# EAGLE board BUB_II.v1.2 (EAGLE 5.11)
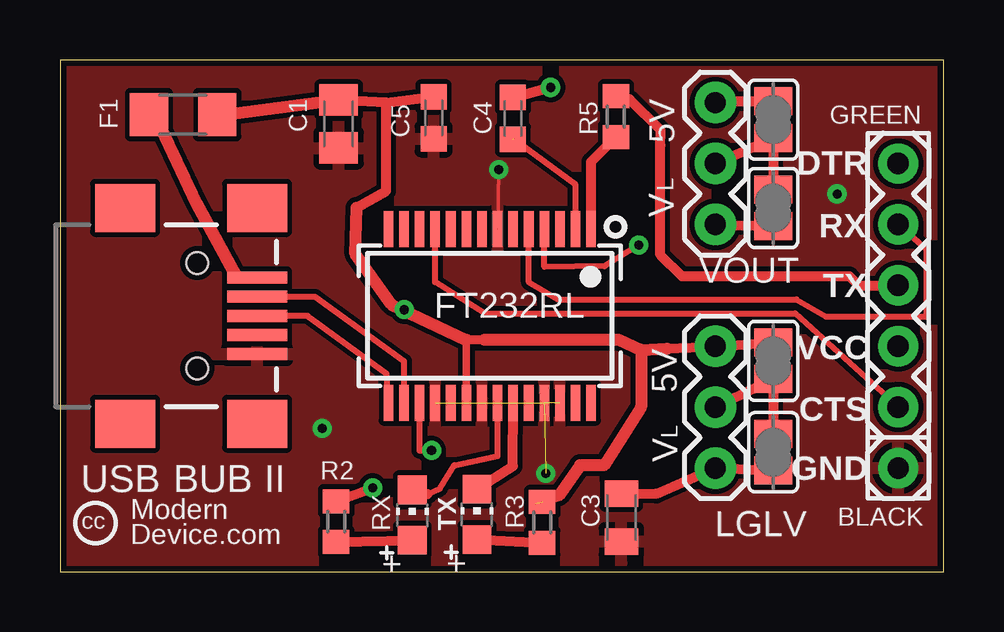
[diagram p0: board, top side]
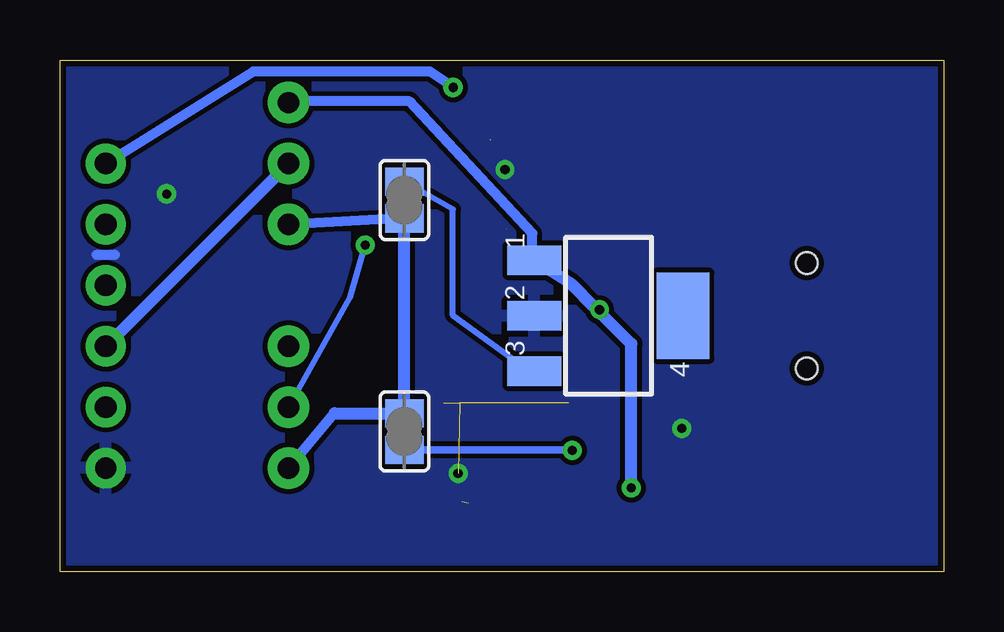
[diagram p1: board, bottom side, seen from below]

Size 36.83 x 21.34 mm. Coordinates in mm from the lower left corner, seen from the top.
Outline: 0,0 36.83,0 36.83,21.34 0,21.34 0,0
Copper layers (1*16): Top 0.035mm / dielectric 1.5mm / Bottom 0.035mm
Design rules "default *": minimum track width 10mil, minimum drill 15mil, track to track 8mil, track to pad 8mil, pad to pad 8mil, via to via 8mil, smd to smd 8mil, copper to edge 10mil, drill to drill 8mil, minimum pad ring 10mil, minimum via ring 8mil, stop-mask expansion 4mil, vias tented up to drill 25mil, thermal gap 10mil
Net classes: 0 default: width 0.254 mm, clearance 0.203 mm; 1 power: width 0.508 mm, clearance 0.203 mm to class 0, clearance 0.203 mm
tRestrict: area 20.4,6.5 to 20.6,7.6; area 19.8,6.7 to 20,7.4; area 21,6.6 to 21.1,7.5

## Footprints (pad centres in the part's own frame; a part is rotated, then mirrored left to right if it is on the bottom)
SJ = smd 1.168 x 1.6: 1 -0.762,0; 2 0.762,0
C0805K = smd 1.3 x 1.6: 1 -1,0; 2 1,0
C0805K' = smd 1.1 x 1.4: 1 -1,0; 2 1,0
C0603K = smd 1.05 x 1.08: 1 -0.875,0; 2 0.875,0
USB-MINIB = smd 2.5 x 0.5: D+ 2.5,0; D- 2.5,0.8; GND 2.5,-1.6; ID 2.5,-0.8; VBUS 2.5,1.6 | smd 2.5 x 2: MTN1 -3,4.5; MTN2 2.5,4.5; MTN3 -3,-4.5; MTN4 2.5,-4.5 | hole 0.9: 0,2.2; 0,-2.2
R1206 = smd 1.6 x 1.803: 1 -1.422,0; 2 1.422,0
SSOP28 = smd 0.4 x 1.5: 1 -4.225,-3.625; 2 -3.575,-3.625; 3 -2.925,-3.625; 4 -2.275,-3.625; 5 -1.625,-3.625; 6 -0.975,-3.625; 7 -0.325,-3.625; 8 0.325,-3.625; 9 0.975,-3.625; 10 1.625,-3.625; 11 2.275,-3.625; 12 2.925,-3.625; 13 3.575,-3.625; 14 4.225,-3.625; 15 4.225,3.625; 16 3.575,3.625; 17 2.925,3.625; 18 2.275,3.625; 19 1.625,3.625; 20 0.975,3.625; 21 0.325,3.625; 22 -0.325,3.625; 23 -0.975,3.625; 24 -1.625,3.625; 25 -2.275,3.625; 26 -2.925,3.625; 27 -3.575,3.625; 28 -4.225,3.625
1X06 = drill 0.889 pad 1.676 round: 1 0,0 | drill 0.9 pad 1.676 round: 2 2.54,0; 3 5.08,0; 4 7.62,0; 5 10.16,0; 6 12.7,0
1X03 = drill 0.889 pad 1.727 round: 1 0,0; 2 2.54,0; 3 5.08,0
R0603 = smd 1 x 1.1: 1 -0.85,0; 2 0.85,0
CHIP-LED0805 = smd 1.2 x 1.2: A 0,-1.05; C 0,1.05
SOT223 = smd 1.219 x 2.235: 1 -2.311,-3.099; 2 0,-3.099; 3 2.311,-3.099 | smd 3.6 x 2.2: 4 0,3.099

## Placement (x,y rotation side)
3V3_OUT  [SJ]  22.48,5.84 270 bottom
C1  10uF  [C0805K]  11.61,18.67 270 top
C3  1uF  [C0805K']  23.39,2.26 270 top
C4  0.1uF  [C0603K]  18.87,18.9 270 top
C5  0.1uF  [C0603K]  15.57,18.92 270 top
CN1  MINIB  [USB-MINIB]  5.71,10.67 0 top
F1  Bourns MF-PSMF035X-2  [R1206]  5.13,19.05 0 top
FT232RL  FT232RL  [SSOP28]  17.91,10.67 180 top
FTDI  [1X06]  34.92,4.32 90 top
LGLV  [1X03]  27.3,4.32 90 top
R2  1K  [R0603]  11.51,2.08 270 top
R3  1K  [R0603]  20.09,2.06 270 top
R5  10k  [R0603]  23.16,18.97 270 top
RX  Green  [CHIP-LED0805]  14.68,2.36 0 top
SJ1  [SJ]  29.72,18.85 270 top
SJ2  [SJ]  29.72,8.79 270 top
SJ4  [SJ]  29.72,15.16 270 top
SJ5  [SJ]  29.72,4.98 270 top
TX  Red  [CHIP-LED0805]  17.37,2.39 0 top
VOUT  [1X03]  27.3,14.48 90 top
VR  MCP1703DB  [SOT223]  13.97,10.67 270 bottom
VR_OUT  [SJ]  22.48,15.49 270 bottom

## Library data of the parts
3V3_OUT SJ1 SJ2 SJ4 SJ5 VR_OUT = jumper
C1 C4 C5 R2 R3 R5 = rcl
C3 F1 RX TX = adafruit
CN1 = SparkFun
FT232RL = ftdichip; MPN: FT232RL; OC_FARNELL: 1146032; OC_NEWARK: 91K9918
FTDI LGLV VOUT = modernDevice
VR = linear

## Nets
3V3OUT: 3V3_OUT.2 FT232RL.17
+5V [power]: C1.1 C5.1 F1.2 FT232RL.20 LGLV.3 R2.1 R3.1 SJ1.1 SJ2.1 VOUT.3 VR.1
CTS: FT232RL.11 FTDI.2
DTR: C4.2 FT232RL.2
GND [power]: C1.2 C3.2 C5.2 CN1.GND FT232RL.7 FT232RL.18 FT232RL.21 FT232RL.25 FT232RL.26 FTDI.1 VR.2
N$3: CN1.D+ FT232RL.15
N$4: CN1.D- FT232RL.16
N$5: FT232RL.1 R5.2
N$6: FT232RL.23 TX.C
N$7: FT232RL.22 RX.C
N$8: R2.2 RX.A
N$9: R3.2 TX.A
N$11 [power]: CN1.VBUS F1.1
RST: C4.1 FTDI.6
RTS: FT232RL.3
RX: FT232RL.5 FTDI.5
TX: FTDI.4 R5.1
V_LOGIC: FT232RL.4 LGLV.2 SJ2.2 SJ5.1
V_OUT [power]: FTDI.3 SJ1.2 SJ4.1 VOUT.2
VL+ [power]: 3V3_OUT.1 C3.1 LGLV.1 SJ4.2 SJ5.2 VOUT.1 VR_OUT.2
VR_OUT: VR.3 VR_OUT.1

## Tracks (layer width: path | path; a pad name or v marks a point on that pad's centre or on a via)
3V3OUT  (via drill 0.38 pad 0.79)
  Top 0.254: v15.48,5.05 15.08,5.05 14.98,5.05 FT232RL.17
  Bottom 0.254: v15.48,5.05 15.89,5.08
  Bottom 0.305: 15.89,5.08 3V3_OUT.2
+5V  (via drill 0.38 pad 0.71, 0.38 pad 0.79)  (1 unrouted)
  Top 0.305: 16.93,9.66 FT232RL.20
  Top 0.4: 16.93,9.66 17.69,9.68
  Top 0.406: R2.1 v13.03,3.5 | 13.81,11.14 v14.35,10.92 14.28,10.74 | 13.59,19.56 C1.1 | 13.59,19.56 13.59,15.88 12.36,15.17 | 13.59,19.56 C5.1 | 25.29,9.3 LGLV.3 SJ2.1 | SJ1.1 27.36,19.61 VOUT.3
  Top 0.508: 17.69,9.68 23.28,9.68 24.22,9.24 | 12.36,15.17 12.3,13.25 13.81,11.14 16.93,9.66 | 19.83,2.86 20.79,3.18 21.67,4.44 22.67,4.44 24.22,6.87 24.22,9.24 | 24.22,9.24 25.29,9.3 | F1.2 6.54,19 6.52,18.98 C1.1
  Bottom 0.406: 14.59,11.06 v14.35,10.92 | VR.1 17.14,13.06 17.14,14.1 22.28,19.61 27.64,19.61 VOUT.3
  Bottom 0.508: v13.03,3.5 13.03,9.5 14.59,11.06 15.49,11.96 VR.1
CTS
  Top 0.254: FT232RL.11 15.63,12.07 17.7,10.77 30.63,10.77 FTDI.2
DTR  (1 unrouted)
  Top 0.254: 18.57,17.75 C4.2 | FT232RL.2 21.48,16.14 18.91,18.04
GND  (via drill 0.38 pad 0.79, 0.38 pad 0.81)  (5 unrouted)
  Top 0.152: 18.24,14.28 v18.29,16.76
  Bottom 0.406: 34.54,13.21 35.31,13.21
  other vias: 10.92,5.97 32.38,15.75 20.24,4.09
  pour Top: -7.24,24.51 -2.79,-1.78 38.35,-1.65 38.35,22.86
  pour Bottom: -4.27,26.37 -1.27,-1.27 37.59,-1.14 37.59,24.38
N$3
  Top 0.254: FT232RL.15 13.68,6.98 13.61,8.25 10.3,10.67 CN1.D+
N$4
  Top 0.254: CN1.D- 10.62,11.47 14.33,8.78 FT232RL.16
N$5
  Top 0.406: FT232RL.1 22.13,17.09 R5.2
N$6
  Top 0.406: FT232RL.23 18.87,4.39 TX.C
N$7
  Top 0.254: FT232RL.22 18.23,4.82 16.43,4.44 15.82,3.45 15.32,3.22
  Top 0.406: RX.C 15.32,3.22
N$8
  Top 0.406: R2.2 RX.A
N$9
  Top 0.406: TX.A R3.2
N$11
  Top 0.406: 3.91,19.16 3.82,19.16 F1.1
  Top 0.508: F1.1 3.71,19.04 | 3.91,19.16 5.69,15.35 7.37,12.28 CN1.VBUS
RST  (via drill 0.38 pad 0.81)
  Top 0.406: C4.1 v20.45,20.19
  Bottom 0.406: FTDI.6 28.78,20.85 21.41,20.85 v20.45,20.19
RX
  Top 0.254: FT232RL.5 19.53,12.07 20.76,11.35 30.68,11.35 31.91,10.63 35.47,10.63 36.11,10.64 36.11,13.42 FTDI.5
TX
  Top 0.406: FTDI.4 33.27,11.94 32.89,12.32 25.91,12.32 25.02,13.21 25.02,17.78 25.03,18.29 25.03,18.4 23.75,19.68 23.3,19.68 R5.1
V_LOGIC  (via drill 0.38 pad 0.79)
  Top 0.254: FT232RL.4 20.18,12.71 22.69,12.73 v24.11,13.62
  Top 0.406: LGLV.2 SJ2.2 SJ5.1
  Bottom 0.254: LGLV.2 24.75,11.45 v24.11,13.62
V_OUT
  Top 0.406: VOUT.2 SJ1.2 SJ4.1
  Bottom 0.508: VOUT.2 FTDI.3
VL+
  Top 0.406: VOUT.1 SJ4.2 | SJ5.2 LGLV.1 24.84,3.25 C3.1
  Bottom 0.406: LGLV.1 25.4,6.6 | VR_OUT.2 VOUT.1
  Bottom 0.508: 25.4,6.6 3V3_OUT.1 VR_OUT.2
VR_OUT
  Bottom 0.254: VR.3 17.25,8.36 20.46,10.68 20.46,15.11 VR_OUT.1

## Text on the board
_tsilk: GREEN | 5V | DTR | L | V | RX | TX | VCC | 5V | CTS | L | V | GND | USB | BUB | II | BLACK | cc | Modern | Device.com
_bsilk: Optional | Modern Device | Voltage Regulator | JUMPER CONTROLS VL | MCP1703T | SOLDER ONLY ONE! | v1 | or equivalent | USB-BUB II | OR